# Altium PCB PCB.PcbDoc
Units mil, origin at the board's own origin, x right, y up, seen from the top; angles counter-clockwise.
Board outline 1000 x 2440 mil, 4 copper layers (Top Layer, 3V3, GND, Bottom Layer), stack 23.756 mil thick; 29 components, 26 nets, 173 pads, 58 vias.
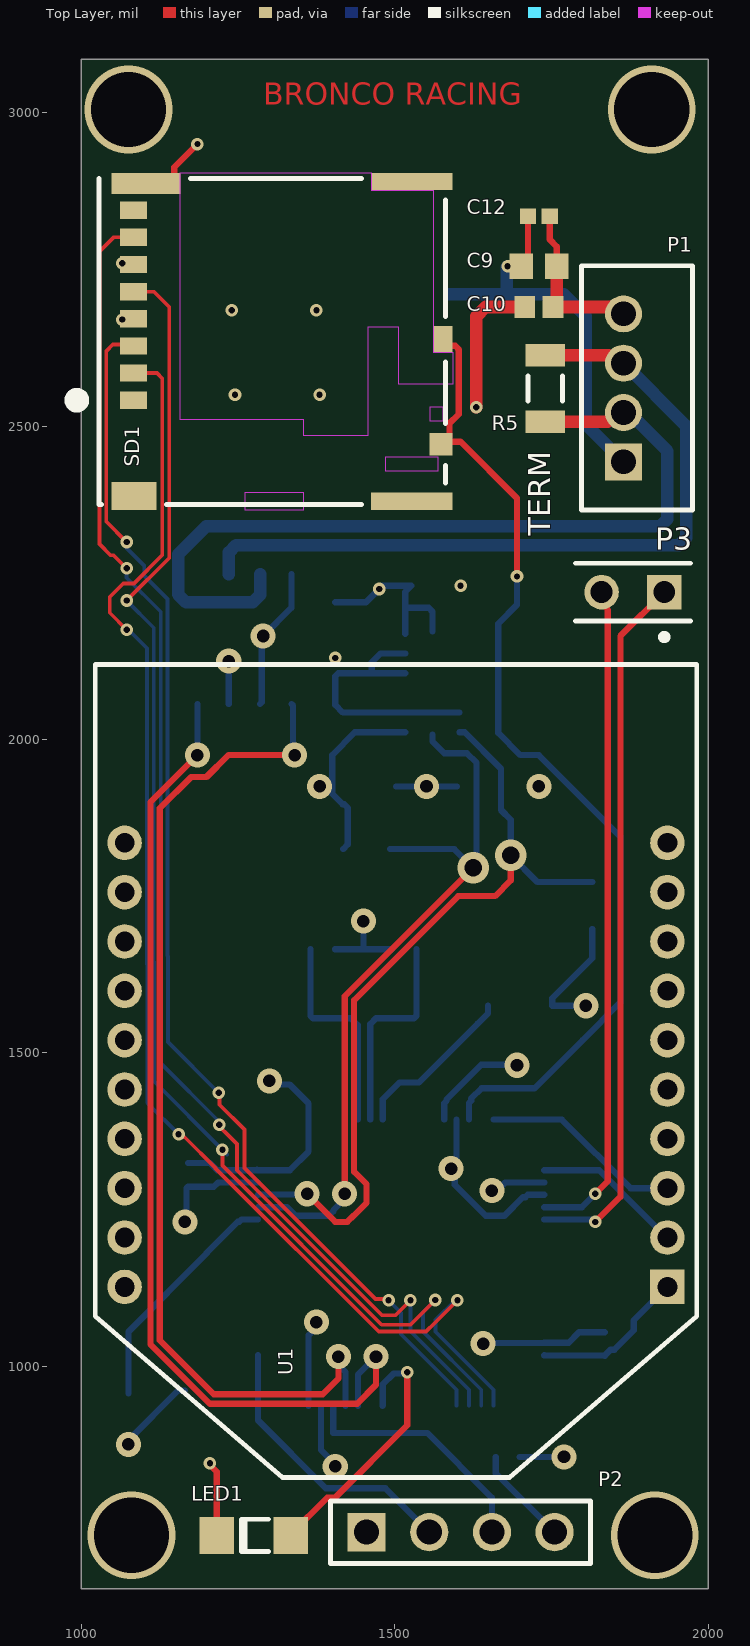
[diagram p0: Top Layer view]
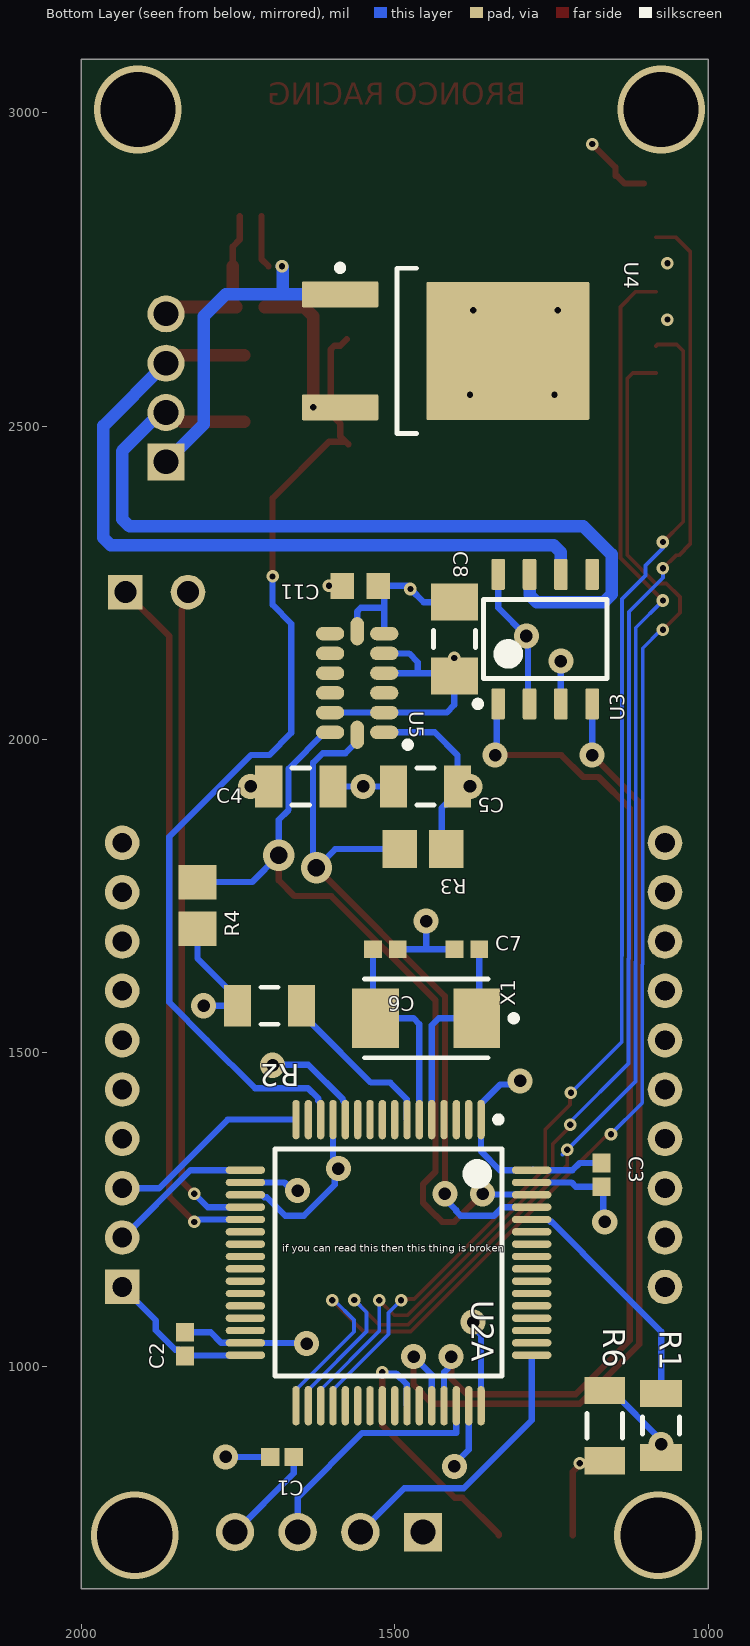
[diagram p1: Bottom Layer view, seen from below]
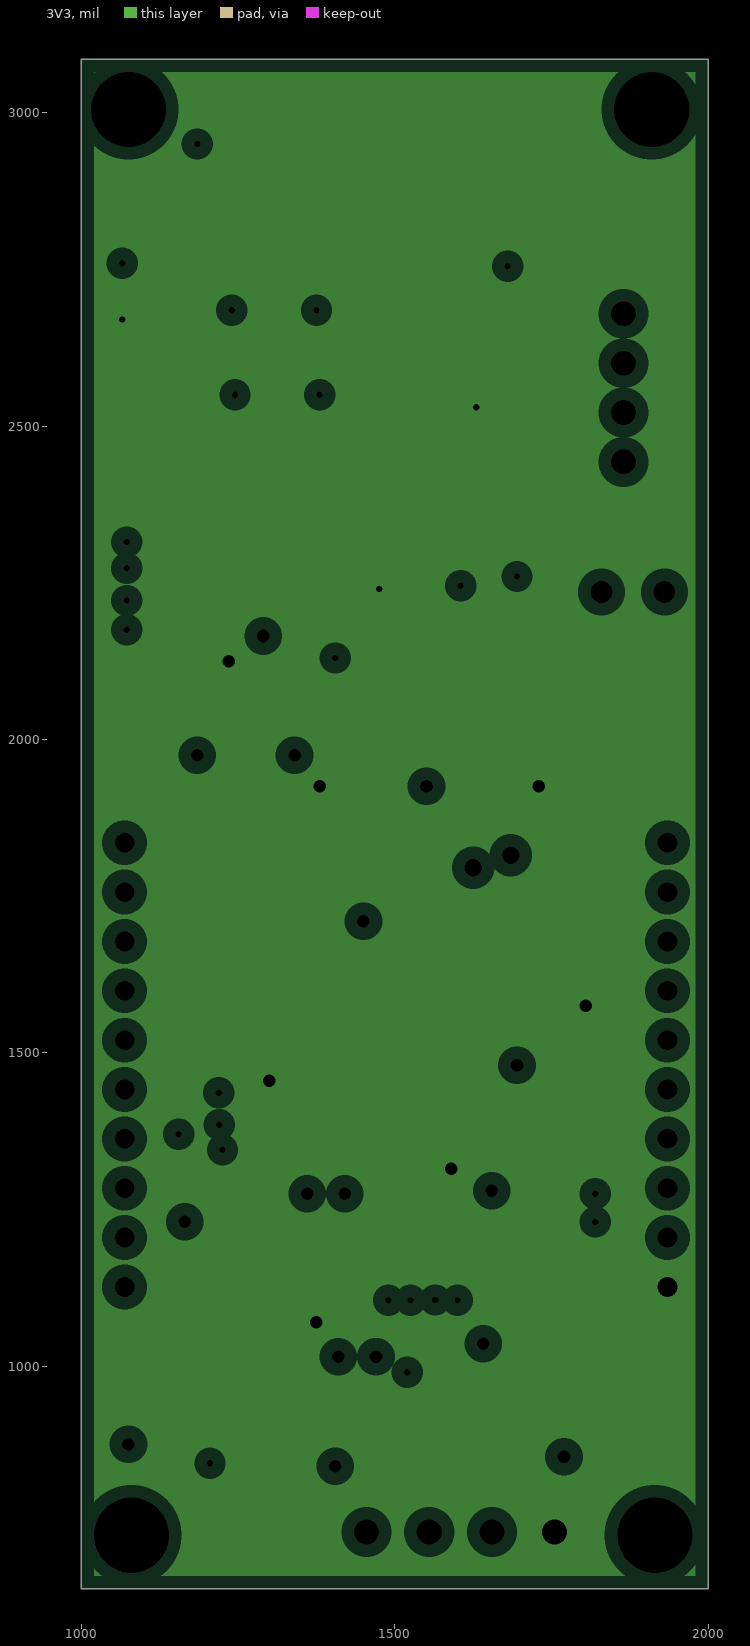
[diagram p2: 3V3, clearances drawn from the general rule]
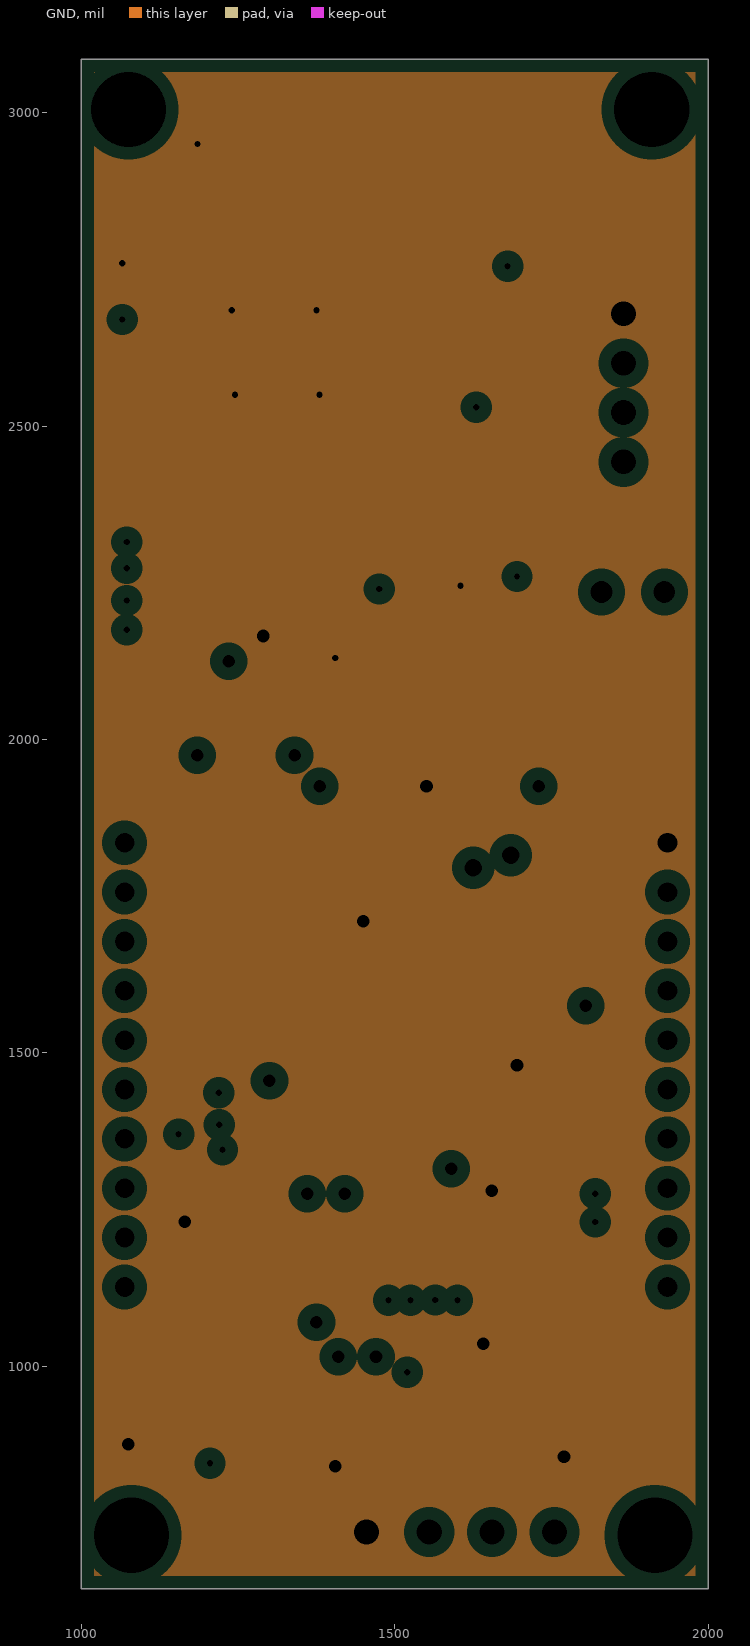
[diagram p3: GND, clearances drawn from the general rule]
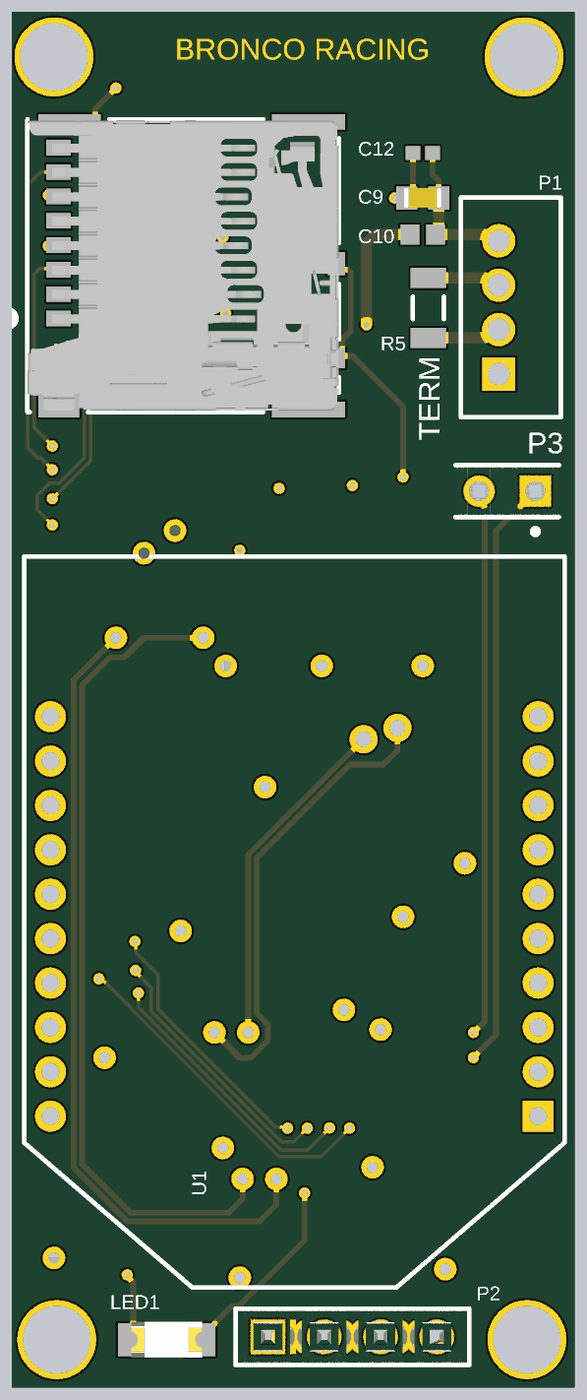
[diagram p4: 3D render of the assembled board from above, using the file's embedded part models]

## Layer stack, top to bottom
Top Solder: solder mask 0.4, Solder Resist, Dk 3.5
Top Layer: signal copper 1.4
Dielectric 2: prepreg 2.8, PP-006, Dk 4.1
3V3: plane copper 1.378, net 3V3
Dielectric 1: dielectric 12.6, FR-4, Dk 4.8
GND: plane copper 1.378, net GND
Dielectric 3: prepreg 2.8, PP-006, Dk 4.1
Bottom Layer: signal copper 1.4
Bottom Solder: solder mask 0.4, Solder Resist, Dk 3.5

## Board outline
1000,645 2000,645 2000,3085 1000,3085

## Design rules (kind name [scope] priority, off if disabled: settings)
Clearance [All] p1 off: gap=5 ignorepadtopadclearanceinfootprint=TRUE except(0: Arc-Hole Track-Hole SMDPad-Hole THPad-Hole Via-Hole Fill-Hole Poly-Hole Region-Hole Text-Hole; 10: Arc-Via Arc-Text Track-Via Track-Text SMDPad-Via SMDPad-Text THPad-THPad THPad-Via THPad-Fill THPad-Poly THPad-Region THPad-Text Via-Via Via-Fill Via-Poly Via-Region Via-Text Text-Text)
PlaneClearance [All] p1: clearance=20
PlaneConnect [All] p1: planeconnectstyle=Relief reliefexpansion=20 reliefentries=4 reliefconductorwidth=10 reliefairgap=10
PolygonConnect [All] p1: connectstyle=Relief reliefconductorwidth=10 reliefentries=4 polygonreliefangle="90 Angle" airgapwidth=10
RoutingVias [All] p1: holewidth=10 width=20 viastyle="Through Hole" minholewidth=10 minwidth=20 maxholewidth=400 maxwidth=400
SolderMaskExpansion [All] p1: expansion=4 istentingtop=FALSE
Width [All] p1: maxlimit=150 minlimit=4 preferedwidth=10 minimp=50.000000 maximp=50.000000 favimp=50.000000
28 further rules are at their usual default settings.

## Components (designator, comment, footprint, x,y, rotation, side; value= is the part's Value field where it differs from the comment)
C1 "C0402C104K8PAC7867" CAPC1005X60X30ML05T10 1680,855 r0 bottom
C2 "C0402C104K8PAC7867" CAPC1005X60X30ML05T10 1835,1035 r90 bottom
C3 "C0402C104K8PAC7867" CAPC1005X60X30ML05T10 1170,1305 r270 bottom
C4 "12065C105KAT2A" CAPC3216X180X50LL20T25 1650,1925 r180 bottom
C5 "12065C105KAT2A" CAPC3216X180X50LL20T25 1451.18,1925 r0 bottom
C6 "CAP 4.3pF 50V 0402(1005)" CAPC0402(1005)60_M 1515,1665 r0 bottom value=4.3pF
C7 "CAP 4.3pF 50V 0402(1005)" CAPC0402(1005)60_M 1385,1665 r180 bottom value=4.3pF
C8 "C1206C105K3RACTU" CAPC3216X180X50ML20T25 1405,2160 r270 bottom
C9 "GRM188R71H104KA93D" CAPC1608X90X35ML10T15 1730,2755 r0 top
C10 "GRM188R61A226ME15D" CAPC1608X100X38LL20T18 1730,2690 r0 top
C11 "GRM188R71H104KA93D" CAPC1608X90X35ML10T15 1555,2245 r0 bottom
C12 "GRM155R61A105KE15D" CAPC1005X55X25NL05T10 1730,2835 r0 top
LED1 "150120BS75000" 1206_A 1275,730 r0 top
P1 "B4B-PH-K-S(LF)(SN)" JST-B4B-PH-K-S_V 1886.65,2560.92 r90 top
P2 "TSW-104-08-T-S" SMTC-TSW-104-08-X-S 1455,735 r0 top
P3 "5-146280-2" TECO-5-146280-2_V 1880,2235 r180 top
R1 "ERA8AEB103V" RESC3216X70X50LL20T25 1075,905 r270 bottom
R2 "ERA8AEB103V" RESC3216X70X50LL20T25 1700,1575 r0 bottom
R3 "ERA6AEB472V" RESC2013X60X40ML20T25 1455,1825 r0 bottom
R4 "ERA6AEB472V" RESC2013X60X40ML20T25 1815,1735 r90 bottom
R5 "CRCW1206120RFKEA" RESC3216X60X45LL10T20 1740,2560 r90 top
R6 "300" RESC3216X70X50NL05T20 1165,905 r90 bottom
SD1 "503398-1892" MOLX-503398-1892_V 1330,2635 r90 top locked
U1 "XBP9B-DMUT-002" *DIP2200W51P200L3294H279Q20P 1501.93,1470.83 r180 top locked
U2A "STM32F303RET6" STM-LQFP64_L 1510,1165 r270 bottom locked
U3 "SN65HVD230DR" D0008A_L 1260,2160 r90 bottom
U4 "TL760M33QKVURQ1" KVU0003A_M 1420,2620 r180 bottom
U5 "ADXL345TCCZ-EP-RL7" ADI-CC-14-1_V 1560,2090 r0 bottom
X1 "ABM3-8.000MHZ-D2Y-T" ABRA-ABM3-2_V 1450,1555 r0 bottom

## Footprints (in the part's own frame and the unit in brackets; to place one, negate y for a bottom-side part, rotate by r counter-clockwise, add the part's x,y. Pads: shape width x height; smd on the part's side, far side on the other; paste and mask are expansions set on the pad)
1206_A [mm] "Chip LED, 2-Leads, Body 3.2x1.6mm, IPC Medium Density"
  rect 1.4x1.5 smd: 1(-1.5,0) 2(1.5,0)
  silkscreen extent -0.5,-0.66 0.6,0.65, body extent -1.6,-0.8 1.6,0.8, height 0.68
*DIP2200W51P200L3294H279Q20P [mm]
  rect 1.4x1.4 hole 0.8: 1(-11,8.75)
  round 1.4 hole 0.8: 2(-11,6.75) 3(-11,4.75) 4(-11,2.75) 5(-11,0.75) 6(-11,-1.25) 7(-11,-3.25) 8(-11,-5.25) 9(-11,-7.25) 10(-11,-9.25) 11(11,-9.25) 12(11,-7.25) 13(11,-5.25) 14(11,-3.25) 15(11,-1.25) 16(11,0.75) 17(11,2.75) 18(11,4.75) 19(11,6.75) 20(11,8.75)
  silkscreen extent -12.19,-16.47 12.19,16.47
ABRA-ABM3-2_V [mm] "SMD, 2-Leads, Body 5x3.2mm, Pitch 4.1mm"
  rect 1.9x2.4 smd: 1(-2.05,0) 2(2.05,0)
  silkscreen extent -3.67,-1.6 2.5,1.6, body extent -2.5,-1.6 2.5,1.6, height 1.3
ADI-CC-14-1_V [mm] "QFN, 14-Leads, Body 5x3mm, Pitch 0.8mm"
  oval 1.145x0.55 smd: 1(-1.098,2) 2(-1.098,1.2) 3(-1.098,0.4) 4(-1.098,-0.4) 5(-1.098,-1.2) 6(-1.098,-2) 8(1.097,-2) 9(1.097,-1.2) 10(1.097,-0.4) 11(1.097,0.4) 12(1.097,1.2) 13(1.097,2)
  oval 0.55x1.145 smd: 7(0,-2.097) 14(0,2.098)
  silkscreen extent -2.18,2.38 -1.93,2.62, body extent -1.5,-2.5 1.5,2.5, height 1
CAPC0402(1005)60_M [mm] "Chip Capacitor, Body 1.0x0.5mm, Height 0.6mm, IPC Low Density"
  rect 0.72x0.72 smd: 1(-0.5,0) 2(0.5,0)
  body extent -0.55,-0.3 0.55,0.3, height 0.6
CAPC1005X55X25NL05T10 [mm] "Chip Capacitor, 2-Leads, Body 1.00x0.50mm, IPC Medium Density"
  rect 0.66x0.62 smd: 1(-0.44,0) 2(0.44,0)
  body extent -0.53,-0.28 0.53,0.27, height 0.55
CAPC1005X60X30ML05T10 [mm] "Chip Capacitor, 2-Leads, Body 1.00x0.50mm, IPC Low Density"
  rect 0.76x0.72 smd: 1(-0.48,0) 2(0.48,0)
  body extent -0.53,-0.28 0.53,0.27, height 0.6
CAPC1608X90X35ML10T15 [mm] "Chip Capacitor, 2-Leads, Body 1.7x0.9mm, IPC Low Density"
  rect 0.95x1.05 smd: 1(-0.725,0) 2(0.725,0)
  body extent -0.85,-0.45 0.85,0.45, height 0.9
CAPC1608X100X38LL20T18 [mm] "Chip Capacitor, 2-Leads, Body 1.80x1.00mm, IPC High Density"
  rect 0.85x0.9 smd: 1(-0.575,0) 2(0.575,0)
  body extent -0.9,-0.5 0.9,0.5, height 1
CAPC3216X180X50LL20T25 [mm] "Chip Capacitor, 2-Leads, Body 3.20x1.60mm, IPC High Density"
  rect 1.1x1.7 smd: 1(-1.3,0) 2(1.3,0)
  silkscreen extent -0.35,-0.75 0.35,0.75, body extent -1.7,-0.9 1.7,0.9, height 1.8
CAPC3216X180X50ML20T25 [mm] "Chip Capacitor, 2-Leads, Body 3.40x1.80mm, IPC Low Density"
  rect 1.5x1.9 smd: 1(-1.5,0) 2(1.5,0)
  silkscreen extent -0.35,-0.85 0.35,0.85, body extent -1.7,-0.9 1.7,0.9, height 1.8
D0008A_L [mm] "SOIC, 8-Leads, Body 5x4mm, Pitch 1.27mm, IPC High Density"
  rrect18% 1.25x0.55 smd: 1(-2.625,1.905) 2(-2.625,0.635) 3(-2.625,-0.635) 4(-2.625,-1.905) 5(2.625,-1.905) 6(2.625,-0.635) 7(2.625,0.635) 8(2.625,1.905)
  silkscreen extent -2.75,-2.5 1.6,2.86, body extent -3,-2.45 3,2.45, height 1.63
JST-B4B-PH-K-S_V [mm] "Connector, 4-Leads, Body 9.9x4.5mm, Pitch 2mm"
  rect 1.5x1.5 hole 1: 1(-3,0.55)
  round 1.5 hole 1: 2(-1,0.55) 3(1,0.55) 4(3,0.55)
  silkscreen extent -4.95,-2.25 4.95,2.25, body extent -4.95,-2.25 4.95,2.25, height 6
KVU0003A_M [mm] "DPAK, 3-Leads, Body 6.7x6.22mm, Pitch 2.29mm, IPC Low Density"
  rrect10% 3.1x1.05 smd: 1(-4.25,2.29) 3(-4.25,-2.29)
  rrect2% 6.6x5.6 smd: 4(2.55,0)
  silkscreen extent -4.38,-3.35 -1.15,3.49, body extent -4.63,-3.28 5.07,3.3, height 2.48
MOLX-503398-1892_V [mm] "CONN, 8-Leads, Body 14.05x13.2mm, Pitch 1.1mm"
  rect 0.7x1.1 smd: 1(-2.38,6.27) 2(-1.28,6.27) 3(-0.18,6.27) 4(0.92,6.27) 5(2.02,6.27) 6(3.12,6.27) 7(4.22,6.27) 8(5.32,6.27)
  rect 1.05x0.78 smd: 9(0.095,-6.27)
  rect 0.9x0.93 smd: 10(-4.17,-6.195)
  rect 0.86x2.8 smd: 11(6.4,5.77)
  rect 0.7x3.3 smd: 12(6.48,-5.01) 13(-6.48,-5.01)
  rect 1.14x1.83 smd: 14(-6.26,6.255)
  Top Layer keep-out region: -3.22,-6.28 -2.67,-6.28 -2.67,-5.73 -3.22,-5.73
  Top Layer keep-out region: -5.235,-6.08 -4.685,-6.08 -4.685,-3.93 -5.235,-3.93
  Top Layer keep-out region: -6.83,-0.63 -6.13,-0.63 -6.13,1.77 -6.83,1.77
  Top Layer keep-out region: 6.83,4.37 6.83,-3.36 6.13,-3.36 6.13,-5.88 -0.43,-5.88 -0.43,-6.66 -1.73,-6.66 -1.73,-4.48 0.57,-4.48 0.57,-3.23 -3.82,-3.23 -3.82,-0.63 -3.17,-0.63 -3.17,4.37
  silkscreen extent -6.6,-6.38 6.6,8.82, body extent -6.55,-6.38 6.55,7.67, height 1.28
RESC2013X60X40ML20T25 [mm] "Chip Resistor, 2-Leads, Body 2.00x1.25mm, IPC Low Density"
  rect 1.4x1.55 smd: 1(-0.95,0) 2(0.95,0)
  body extent -1.1,-0.72 1.1,0.72, height 0.6
RESC3216X60X45LL10T20 [mm] "Chip Resistor, 2-Leads, Body 3.20x1.60mm, IPC High Density"
  rect 0.9x1.6 smd: 1(-1.35,0) 2(1.35,0)
  silkscreen extent -0.5,-0.7 0.5,0.7, body extent -1.65,-0.85 1.65,0.85, height 0.6
RESC3216X70X50LL20T25 [mm] "Chip Resistor, 2-Leads, Body 3.20x1.60mm, IPC High Density"
  rect 1.1x1.7 smd: 1(-1.3,0) 2(1.3,0)
  silkscreen extent -0.35,-0.75 0.35,0.75, body extent -1.7,-0.9 1.7,0.9, height 0.7
RESC3216X70X50NL05T20 [mm] "Chip Resistor, 2-Leads, Body 3.20x1.60mm, IPC Medium Density"
  rect 1.1x1.65 smd: 1(-1.425,0) 2(1.425,0)
  silkscreen extent -0.5,-0.72 0.5,0.72, body extent -1.63,-0.82 1.62,0.82, height 0.7
SMTC-TSW-104-08-X-S [mm] ".025 SQ Post Terminal Strip Assembly, 1x4 Pins, Vertical, 2.54mm Pitch, Male"
  rect 1.55x1.55 hole 1.02: 1(0,0)
  round 1.55 hole 1.02: 2(2.54,0) 3(5.08,0) 4(7.62,0)
  silkscreen extent -1.46,-1.27 9.08,1.27, body extent -1.27,-1.27 8.89,1.27, height 8.38
STM-LQFP64_L [mm] "QFP, 64-Leads, Body 10x10mm, Pitch 0.5mm, IPC High Density"
  oval 1.6x0.3 smd: 1(-5.8,3.75) 2(-5.8,3.25) 3(-5.8,2.75) 4(-5.8,2.25) 5(-5.8,1.75) 6(-5.8,1.25) 7(-5.8,0.75) 8(-5.8,0.25) 9(-5.8,-0.25) 10(-5.8,-0.75) 11(-5.8,-1.25) 12(-5.8,-1.75) 13(-5.8,-2.25) 14(-5.8,-2.75) 15(-5.8,-3.25) 16(-5.8,-3.75) 33(5.8,-3.75) 34(5.8,-3.25) 35(5.8,-2.75) 36(5.8,-2.25) 37(5.8,-1.75) 38(5.8,-1.25) 39(5.8,-0.75) 40(5.8,-0.25) 41(5.8,0.25) 42(5.8,0.75) 43(5.8,1.25) 44(5.8,1.75) 45(5.8,2.25) 46(5.8,2.75) 47(5.8,3.25) 48(5.8,3.75)
  oval 0.3x1.6 smd: 17(-3.75,-5.8) 18(-3.25,-5.8) 19(-2.75,-5.8) 20(-2.25,-5.8) 21(-1.75,-5.8) 22(-1.25,-5.8) 23(-0.75,-5.8) 24(-0.25,-5.8) 25(0.25,-5.8) 26(0.75,-5.8) 27(1.25,-5.8) 28(1.75,-5.8) 29(2.25,-5.8) 30(2.75,-5.8) 31(3.25,-5.8) 32(3.75,-5.8) 49(3.75,5.8) 50(3.25,5.8) 51(2.75,5.8) 52(2.25,5.8) 53(1.75,5.8) 54(1.25,5.8) 55(0.75,5.8) 56(0.25,5.8) 57(-0.25,5.8) 58(-0.75,5.8) 59(-1.25,5.8) 60(-1.75,5.8) 61(-2.25,5.8) 62(-2.75,5.8) 63(-3.25,5.8) 64(-3.75,5.8)
  silkscreen extent -5.92,-4.6 4.6,4.6, body extent -5,-5 5,5, height 1.6
TECO-5-146280-2_V [mm] "Connector, 2-Leads, Body 4.67x2.34mm, Pitch 2.54mm"
  rect 1.4x1.4 hole 0.89: 1(-1.27,0)
  round 1.4 hole 0.89: 2(1.27,0)
  silkscreen extent -2.33,-1.17 2.33,1.94, body extent -2.34,-1.17 2.34,1.17, height 5.33

## Part data
C1 C2 C3: library part CMP-2008-02063-1, Manufacturer=Kemet, Part Number=C0402C104K8PAC7867
C4 C5: library part CMP-2000-05866-1, "Chip Capacitor, 1 uF, +/- 10%, 50 V, -55 to 125 degC, 1206 (3216 Metric), RoHS, Tape and Reel", Capacitance=1µF, Case Size/Dimension=1206, Dielectric=X7R, Manufacturer=AVX, Package Description="2-Pin Surface Mount Device, Body 3.2 x 1.6 mm", Rated Voltage=50V, Tolerance (%)=±10%, Datasheet URL=http://datasheets.avx.com/X7RDielectric.pdf, Datasheet Version=07/2016, Manufacturer URL=http://www.avx.com/, Mounting Technology=SurfaceMount, Package Reference=1206
C6 C7: library part CMP-1034-00340-1, "CAP 4.3pF 50V ±0.25pF 0402 (1005 Metric) Thickness 0.6mm SMD", Case-EIA=0402, Case-Metric=1005, Rated Voltage="50 V", Tolerance=Â±0.25pF, Max Thickness="0.6 mm", Technology=SMT
C8: library part CMP-2000-04991-1, "Chip Capacitor, 1 uF, +/- 10%, 25 V, -55 to 125 degC, 1206 (3216 Metric), RoHS, Tape and Reel", Capacitance=1uF, Capacitance - nF=1000nF, Case Code - in=1206, Case Code - mm=3216, Case Height=1.6mm, Case Length=3.2mm, Dielectric=X7R, Manufacturer=Kemet, Maximum Operating Temperature=+125C, Minimum Operating Temperature=-55C, Operating Temperature Range=-55Cto+125C, Package / Case=1206(3216metric), Package Description="2-Pin Surface Mount Device, Body 3.2 x 1.6 mm", Temperature Coefficient / Code=+/-15%, Tolerance=10%, Voltage Rating=25V, =C1206C105K3RAC7800, Brand=Kemet, Case Width=1.6mm, Class=Class1, Datasheet URL=https://ciiva.com/datasheet-click-18194173?src=ciiva&sig=6daff8c4, Datasheet Version=Jul-14, Dimensions=1.6mmWx3.2mmLx1.6mmH, Factory Pack Quantity=2000, Manufacturer URL=http://www.kemet.com/, Package Reference=1206, Packaging=Reel, Product=GeneralTypeMLCCs, Product Category=MultilayerCeramicCapacitorsMLCC-SMD/SMT, RoHS=Details, Series=C1206C, Termination Style=SMD/SMT, Type=SMDMLCCX7R6.3-250VDCCommericalGrade, Voltage Rating DC=25V
C9 C11: library part CMP-2100-03643-1, "Chip Capacitor, 0.1 uF, +/- 10%, 50 V, -55 to 125 degC, 0603 (1608 Metric), RoHS, Tape and Reel", Capacitance=100nF, Case/Package=0603, Case Code (Metric)=1608, Dielectric=X7R, Dielectric Material=Ceramic, Insulation Resistance=10GR, Manufacturer=Murata, Max Operating Temperature=125degC, Min Operating Temperature=-55degC, Package Description="2-Pin Surface Mount Device, Body 1.6 x 0.8 mm", Package Quantity=1, Tolerance=10%, Voltage=50V, Case Code (Imperial)=0603, Contact Plating=Tin, Datasheet URL=http://psearch.en.murata.com/capacitor/product/GRM188R71H104KA93%23.pdf, Datasheet Version=42675.0, Depth=0.8mm, Height=0.8mm, Lead Free=LeadFree, Length=1.6mm, Manufacturer URL=http://www.murata.com/, Material=Ceramic, Mount=SurfaceMount, Number of Pins=2, Package Reference=0603, Packaging=TapeandReel, Radiation Hardening=No, REACH SVHC=NoSVHC, RoHSCompliant=true, Termination=SMD/SMT, Thickness=0.035inch, Voltage Rating=50V, Voltage Rating (DC)=50V, Width=0.8mm
C10: library part CMP-2000-06337-1, "Chip Capacitor, 22 uF, +/- 20%, 10 V, -55 to 85 degC, 0603 (1608 Metric), RoHS, Tape and Reel", Capacitance=22uF, Case Code - in=0603, Case Code - mm=1608, Dielectric=X5R, Manufacturer=Murata, Maximum Operating Temperature=+85C, Minimum Operating Temperature=-55C, Package / Case=0603(1608metric), Package Description="2-Pin Surface Mount Device, Body 1.6 x 0.8 mm", Tolerance=20%, Voltage Rating DC=10VDC, Brand=MurataElectronics, Datasheet URL=http://download.siliconexpert.com/pdfs/2016/4/15/5/14/5/748/mrt_/manual/267693161154190grm188r61a226me1523.pdf, Datasheet Version=04/2016, Factory Pack Quantity=4000, Height=0.8mm, Length=1.6mm, Manufacturer URL=http://www.murata.com/, Mounting Technology=SurfaceMount, Package Reference=1608, Packaging=Reel, Product=GeneralTypeMLCCs, Product Category=MultilayerCeramicCapacitorsMLCC-SMD/SMT, RoHS=True, Series=GRM, Termination Style=SMD/SMT, Type=VoltageandTemperatureDeratingRecommendedProduct, Unit Weight=0.000222oz, Width=0.8mm
C12: library part CMP-2008-04556-1, Manufacturer=Murata, Part Number=GRM155R61A105KE15D
LED1: library part CMP-1426-00015-1, "SMD mono-color Chip LED, WL-SMCW, Blue", Color=Blue, Manufacturer="Wuerth Elektronik", ComponentLink1Description="Manufacturer URL", ComponentLink1URL=http://www.we-online.com, ComponentLink2Description=Datasheet, ComponentLink2URL=http://katalog.we-online.com/led/datasheet/150120BS75000.pdf, PackageReference=1206_A, PartNumber=150120BS75000
P1: library part CMP-2000-05165-1, "Male Header, Pitch 2 mm, 1 x 4 Position, Height 6 mm, Tail Length 3.4 mm, -25 to 85 degC, RoHS, Bulk", Manufacturer=JST, Datasheet URL=http://datasheet.octopart.com/B4B-PH-K-S%28LF%29%28SN%29-JST-datasheet-10558886.pdf, Datasheet Version=Apr-09, Manufacturer URL=http://www.jst.com/home2.html, No of Positions=4, Pitch=2mm, Style/Orientation=StraightHeader/Plug, Termination=Crimp, Type=ShroudedHeader
P2: library part CMP-1024-00356-1, "0.025\" SQ Post Header, Through-hole, Vertical, -55 to 105 degC, 2.54 mm Pitch, 4-Pin, Male, RoHS", Manufacturer=Samtec, Temperature Range="-55 to 105 degC", ComponentLink1Description="Manufacturer URL", ComponentLink1URL=http://www.samtec.com, ComponentLink2Description=Datasheet, ComponentLink2URL=http://www.samtec.com/documents/webfiles/pdf/TSW_TH.PDF, ComponentLink3Description="Package Specification", ComponentLink3URL=http://www.samtec.com/documents/webfiles/cpdf/TSW-XXX-XX-XXX-X-XX-XXX-MKT.pdf, DatasheetVersion=F-214, Mounting Technology=Through-hole, Orientation=Vertical, PackageDescription=".025[0.64] SQ. Post Terminal Strip Assembly", PackageReference=TSW-104-08-X-S, PackageVersion="DM, 8/1988", PartNumber=TSW-104-08-T-S, Pitch="2.54 mm", RoHS=True
P3: library part CMP-2000-07492-1, "Male Header, Pitch 2.54 mm, 1 x 2 Position, Height 8.21 mm, Tail Length 3.05 mm, -65 to 105 degC, RoHS, Bulk", Case\/Package=100, Colour=Black, Current Rating=3A, Flammability Rating=UL94V-0, High Temperature Housing=Yes, Manufacturer="TE Connectivity", Max Current Rating=5A, Max Operating Temperature=105degC, Min Operating Temperature=-65degC, Package Description="Male Header, Pitch 2.54 mm, 1 x 2 Position, Height 8.21 mm, Tail Length 3.05 mm", Package Quantity=500, Approvals=CSA, Board Standoff=No(Without), Connector Type=Header, Contact Gender=Male, Contact Material=CopperAlloy, Contact Mating Length=0.23inch, Contact Plating=Matte, Contact Protection=No(Without), Contact Shape=Square, Datasheet URL=http://www.te.com/commerce/DocumentDelivery/DDEController?Action=showdoc&DocId=Customer+Drawing%7F146280%7FH1%7Fpdf%7FEnglish%7FENG_CD_146280_H1.pdf%7F5-146280-2, Datasheet Version="Rev. H1, 08/2016", Depth=2.34mm, Gasket=No(Without), High Speed Serial Data Connector=No, Housing Colour=Black, Housing Material=Polymer, Keyed=No, Length=4.67mm, Manufacturer URL=http://www.te.com/, Mating Alignment=No(Without), Mating Connector Lock=No(Without), Mating Post Length=0.23inch, Mount=ThroughHole, Mounting Technology=ThroughHole, Number of Contacts=2, Number of Positions=2, Number of Rows=1, Orientation=Straight, Package Reference=5-146280-2, Packaging=Carton, Panel Mount Retention=No(Without), PCB Mount Retention=Without, PCB Mounting Orientation=Vertical, PCB Thickness=0.063inch, Pitch=2.54mm, Radiation Hardening=No, RoHSCompliant=true, Row Spacing=2.54mm, Selectively Loaded=No(Without), Stabilizers=No(Without), Termination=ThroughHole, Termination Post Length=0.12inch
R1 R2: library part CMP-2003-04407-1, Manufacturer=Panasonic, Part Number=ERA8AEB103V
R3 R4: library part CMP-2001-00644-1, Manufacturer=Panasonic, Part Number=ERA6AEB472V
R5: library part CMP-2003-04838-1, Manufacturer="Vishay Dale", Part Number=CRCW1206120RFKEA
R6: library part CMP-2003-00831-1, Manufacturer=Panasonic, Part Number=ERJ8ENF3000V
SD1: library part CMP-2000-05621-1, "Micro SD Connector, Pitch 1.1 mm, 8 Position, Height 1.4 mm, -25 to 85 degC, RoHS, Tape and Reel", Current Rating=500mA, Manufacturer=Molex, Package Description="Micro SD Connector, Pitch 1.1 mm, 8 Position, Height 1.4 mm", Voltage Rating=10VAC/DC, Brand=Molex, Datasheet URL=http://www.molex.com/pdm_docs/sd/5033981892_sd.pdf, Datasheet Version="Rev. E, 04/2006", Factory Pack Quantity=2400, Manufacturer URL=http://www.molex.com/, Mounting Technology=SurfaceMount, Package Reference=503398-1892, Packaging=Reel, Product Category=MemoryCardConnectors, RoHS=Details, Series=503398
U1: "XBee-PRO 900HP DigiMesh 900 MHz 200 Kbps RF Module with U.FL Connector", Package="Module Digi International", Availability=Unavailable, MF="Digi International", MP=XBP9B-DMUT-002, Price=None, SnapEDA_Link=https://www.snapeda.com/parts/XBP9B-DMUT-002/Digi%20International/view-part/?ref=snap
U2A: library part CMP-0537-00048-1, "ARM Cortex-M4 32-bit MCU, 512 KB Flash, 80 KB Internal RAM, 51 I/Os, 64-Pin LQFP, -40 to 85 degC, Tray", I/Os (High Current)=51, Operating Frequency(F) (Processor speed) (MHz)=72, Package Description="64-Pin Low-profile Quad Flat Package, Body 10 x 10 mm, Pitch 0.5 mm", Package Reference=LQFP64, Supply Voltage(Vcc) min (V)=2, ComponentLink1Description="Manufacturer URL", ComponentLink1URL=http://www.st.com/, ComponentLink2Description=Datasheet, ComponentLink2URL=http://www.st.com/st-web-ui/static/active/en/resource/technical/document/datasheet/DM00118585.pdf, Core="ARM Cortex-M4", D/A Converter=2, DatasheetVersion="Rev. 5", FLASH Size (Prog) (kB)=512, Internal RAM Size (kB)=80, Mounting Technology="Surface Mount", Packing=Tray
U3: library part CMP-0315-00015-2, "3.3V CAN Transceiver with Standby Mode, 17 mA, -40 to 85 degC, 8-pin SOIC (D), Green (RoHS & no Sb/Br)", Drivers Per Package=1, Low Power Mode=Standby, Manufacturer="Texas Instruments", Rating=Catalog, Supply Voltage(s)(V)=3.3, Code_JEDEC=MS-012AA, ComponentLink1Description=Datasheet, ComponentLink1URL=http://www.ti.com/general/docs/lit/getliterature.tsp?genericPartNumber=SN65HVD230&fileType=pdf, DatasheetVersion=SLOS346K, Eco-Plan="Green (RoHS & no Sb/Br)", ICC(Max)(mA)=17, Isolated=No, Mounting Technology="Surface Mount", PackageDescription="8-Pin Plastic Small Outline Integrated Circuit, 4.9 x 3.9 mm, Pitch 1.27 mm Pitch", PackageReference=D0008A, PackageVersion="revM, Jun-2011", PartNumber=SN65HVD230DR, Receivers Per Package=1, SubFamily=CAN, Transient Pulse Protection(V)="-25 to 25"
U4: library part CMP-0395-01069-2, "Single Output Automotive LDO, 500 mA, Fixed 3.3 V Output, 3.8 to 26 V Input, 3-pin PFM (KVU), -40 to 125 degC, Green (RoHS & no Sb/Br)", Manufacturer="Texas Instruments", Rating=Automotive, Accuracy(%)=3, Code_JEDEC=TO-252, ComponentLink1Description="Manufacturer URL", ComponentLink1URL=http://www.ti.com/, ComponentLink2Description=Datasheet, ComponentLink2URL=http://www.ti.com/general/docs/lit/getliterature.tsp?genericPartNumber=TL760M33-Q1&fileType=pdf, ComponentLink3Description="Package Specification", ComponentLink3URL=http://www.ti.com/litv/pdf/mpsf018c, ComponentLink4Description="URL Link1", ComponentLink4URL="Samples URL:http://www.ti.com/product/tl760m33-q1#samples", DatasheetVersion=SGLS284I, Eco-Plan="Green (RoHS & no Sb/Br)", Fixed Output Options(V)=3.3, Iout(Max)(A)=0.5, Iq(Typ)(mA)=20, Mounting Technology="Surface Mount", PackageDescription="3-Pin Plastic Flange Mount, Body 6.1 x 6.6 mm, Pitch 2.29 mm", PackageReference=KVU0003A, PackageVersion=4205521-2/D, PartNumber=TL760M33QKVURQ1, SubFamily="Single Channel LDO", Vdo(Typ)(mV)=500, Vin(Max)(V)=26, Vin(Min)(V)=3.8, Vout Adj(Max)(V)=3.3, Vout Adj(Min)(V)=3.3
U5: library part CMP-0885-00032-1, "3-Axis, +/-2 g / +/-4 g / +/-8 g / +/-16 g Digital Accelerometer with Digital Output, 1.6 KHz BW, Industrial, 14-pin LGA, Reel", Manufacturer="Analog Devices", Supply Current="140 uA", Voltage Supply (V)="2.0 to 3.6", # of Axes=3, -3dB Bandwidth="1.6 KHz", ComponentLink1Description="Manufacturer URL", ComponentLink1URL=http://www.analog.com/en/index.html, ComponentLink2Description=Datasheet, ComponentLink2URL=http://www.analog.com/static/imported-files/data_sheets/ADXL345-EP.pdf, ComponentLink3Description="Package Specification", ComponentLink3URL=http://www.analog.com/static/imported-files/data_sheets/ADXL343.pdf, ComponentLink4Description="Product URL", ComponentLink4URL=http://www.analog.com/en/mems-sensors/mems-inertial-sensors/adxl345/products/product.html, DatasheetVersion="Rev. A", Mounting Technology="Surface Mount", Output Type=Digital, PackageDescription="14-Pin Land Grid Array, 3 x 5 mm Body, 0.8 mm Pitch", PackageReference=CC-14-1, PackageVersion="03-16-2010-A, 03/2010", Packing=Reel, PartNumber=ADXL345TCCZ-EP-RL7, Sensitivity="256/128/64/32 LSB/g"
X1: library part CMP-2000-05033-1, "Miniature Ceramic Crystal, 8 MHz, -40 to 85 degC, 2-Pin SMD, RoHS, Tape and Reel", Case Height=1.3mm, Case Length=5mm, Case Width=3.2mm, Frequency=8MHz, Frequency Stability=30PPM, Load Capacitance=18pF, Manufacturer=ABRACON, Operating Temperature Range=-40Cto+85C, Package / Case=5mmx3.2mm, Package Description="2-Pin Surface Mount Device, Body 5 x 3.2 mm", Package Reference=ABM3-2, Tolerance=20PPM, Brand=ABRACON, Datasheet URL=http://www.farnell.com/datasheets/1754353.pdf, Datasheet Version=Sep-13, Dimensions=3.2mmWx5mmLx1.3mmH, ESR=140Ohms, Factory Pack Quantity=1000, Manufacturer URL=http://www.abracon.com/, Mounting Style=SMD/SMT, Package URL=http://www.abracon.com/Support/PackageDrawing/Resonators/ABM3.PDF, Packaging=Reel, Product Category=Crystals, RoHS=Details, Series=ABM3, Termination Style=SMD/SMT, Type=MiniatureCeramicCrystal

## Via types
v1: diameter 20, hole 10, Top Layer to Bottom Layer, 29 vias
v2: diameter 40, hole 20, Top Layer to Bottom Layer, 23 vias
v3: diameter 140, hole 120, Top Layer to Bottom Layer, 4 vias
v4: diameter 50, hole 28, Top Layer to Bottom Layer, 2 vias

## Nets (pads, with @x,y where several pads share a name; then routed paths per layer and width w, separated by ;. In a path a pad name is that pad's centre, name@x,y a point inside that pad or via, vN(x,y) a via of type N, cw(c..) or ccw(c..) an arc to the next point about the centre after c; other vN are vias at no path point)
3V3: C1.1 C2.1 C3.1 C4.1 C5.1 C8.1 C10.1 C11.1 P2.4 R2.2 R3.1 R4.1 SD1.4 U1.1 U2A.1 U2A.13 U2A.19 U2A.32 U2A.48 U2A.64 U3.3 U4.3 U5.1 U5.6 U5.7 | length 2288.1
  Top Layer w20: v1(1630,2530) 1630,2675 1645,2690 C10.1
  Bottom Layer w10: C3.1 1205.25,1323.9 1216.51,1312.64 U2A.64@1280.84,1312.64 ; U3.3 v2(1235,2125) ; U2A.64@1280,1313.47 U2A.64@1280.84,1312.64 ; v2(1300,1455) 1305.74,1449.26 1332.04,1449.26 1362.36,1418.94 U2A.1 1362.36,1342.36 1332.64,1312.64 U2A.64 U2A.64@1280.84,1312.64 ; U2A.48 1362.36,1049.24 1375,1061.88 v2(1375,1070) ; C8.1 1454.06,2219.06 v1(1475,2240) 1480,2245 C11.1 1516.79,2235.33 1516.79,2210 ; R3.1 1425,1832.4 1425,1890.68 1419.14,1896.54 1416.65,1896.54 1400,1913.19 C5.1 1400,1975 1436.26,2011.26 U5.1 ; U5.6 1516.79,2210 ; U5.7 1560,2204.14 1554.14,2210 1516.79,2210 ; U2A.13 1598.58,1331.7 1590,1323.12 v2(1590,1315) 1595.74,1309.26 1595.74,1289.26 1645,1240 1675,1240 1704.49,1269.49 1708.49,1269.49 1712.27,1273.27 U2A.19 ; C1.1@1660.55,854.45 C1.1 1661.1,828.9 P2.4 ; U2A.32 1738.69,1017.02 1834.09,1017.02 C2.1 1835,1016.89 1844.17,1026.06 1850.44,1026.06 1881.44,1057.06 1881.44,1072.78 U1.1 ; v2(1805,1575) R2.2 1751.18,1586.81 1815,1650.63 R4.1
  other v1: 1065,2670
  other v2: 1380,1925 1730,1925
+12: C9.1 C12.1 P1.1 U4.1 | length 619.4
  Top Layer w10: C9.1 1712.68,2766.22 C12.1
  Bottom Layer w20: U4.1 1678.58,2710.16 ; v1(1680,2755) 1678.58,2753.58 1678.58,2710.16 ; P1.1 1805,2502.81 1805,2675 1769.84,2710.16 1678.58,2710.16
AUX1: P3.2 U2A.20 | length 1063
  Top Layer w10: v1(1820,1275) 1840,1295 1840,2206.58 1838.63,2207.95 1838.63,2226.37 P3.2
  Bottom Layer w10: U2A.20 1798.58,1253.58 v1(1820,1275)
AUX2: P3.1 U2A.21 | length 1133.8
  Top Layer w10: v1(1820,1230) 1860,1270 1860,2165 P3.1
  Bottom Layer w10: U2A.21 1813.4,1233.9 1817.29,1230 v1(1820,1230)
CANH: P1.2 R5.1 U3.7 | length 1376.6
  Top Layer w20: R5.1 1839.73,2506.85 1854.43,2521.55 P1.2
  Bottom Layer w20: U3.7 1285,2230.46 1273.28,2218.74 1167.03,2218.74 1154.17,2231.6 1154.17,2295.1 1199.08,2340 1923.28,2340 1935,2351.72 1935,2460.15 1873.6,2521.55 P1.2
CANL: P1.3 R5.2 U3.6 | length 1224.9
  Top Layer w20: R5.2 1841.57,2613.15 1854.43,2600.29 P1.3
  Bottom Layer w20: U3.6@1235.03,2263.38 1235.03,2298.28 1246.75,2310 1953.28,2310 1965,2321.72 1965,2500.29 P1.3
CANRX: U2A.44 U3.4 | length 1599.8
  Top Layer w10: v2(1185,1975) 1110,1900 1110,1035 1205,940 1440,940 1470,970 v2(1470,1015)
  Bottom Layer w10: v2(1185,1975) U3.4 ; U2A.44 1441.1,986.1 v2(1470,1015)
CANTX: U2A.45 U3.1 | length 1633.9
  Top Layer w10: v2(1340,1975) 1234.5,1975 1199.5,1940 1175,1940 1125,1890 1125,1041.21 1211.21,955 1385,955 1410,980 v2(1410,1015)
  Bottom Layer w10: U3.1 1337.5,2054.15 1337.5,1977.5 v2(1340,1975) ; v2(1410,1015) 1410,1006.72 1407.58,1004.3 1421.42,990.46 U2A.45
CARD_DETECT: SD1.9 SD1.10 U2A.14 | length 1601
  Top Layer w10: SD1.10 1574.49,2470.83 SD1.10@1578.66,2475 ; SD1.9 1576.85,2638.43 1587.2,2628.07 1596.35,2628.07 1602.2,2622.21 1602.2,2519.05 1587.2,2504.05 1587.2,2483.54 SD1.10@1578.66,2475 ; v1(1695,2260) 1695,2385 1605,2475 SD1.10@1578.66,2475
  Bottom Layer w10: U2A.14 1618.27,1419.43 1622.05,1423.21 1622.05,1427.05 1638.52,1443.52 1723.02,1443.52 1799.75,1520.25 1860,1580.5 1860,1844.5 1729.58,1974.92 1700.46,1974.92 1665.04,2010.35 1665.04,2184.65 1695,2214.61 v1(1695,2260)
GND: C1.2 C2.2 C3.2 C4.2 C5.2 C6.1 C7.1 C8.2 C9.2 C10.2 C11.2 C12.2 P1.4 P2.1 R1.2 R6.2 SD1.6 SD1.11 U1.10 U2A.12 U2A.18 U2A.31 U2A.47 U2A.63 U3.2 U3.8 U4.4 U5.2 U5.4 U5.5 U5.12 | length 2224.2
  Top Layer w10: SD1.11 1133.07,2886.97 1145,2898.9 1147.95,2898.9 1147.95,2912.95 v1(1185,2950) ; C12.2 1747.32,2797.68 1758.54,2786.46 C9.2
  Top Layer w20: C9.2 1758.54,2695.91 C10.2 1843.46,2690 1854.43,2679.03 P1.4
  Bottom Layer w10: v2(1075,875) 1075,881.93 1154.17,961.1 R6.2 ; v2(1165,1230) 1167.5,1232.5 1167.5,1283.6 C3.2 1211.1,1286.1 1217.95,1292.95 U2A.63 ; U3.2 1287.5,2059.15 1287.5,2162.5 v2(1290,2165) 1335,2210 U3.8 ; U2A.47 1382.05,866.54 1405,843.59 v2(1405,840) ; C7.1 1450,1665 ; v2(1450,1710) 1450,1665 ; C6.1 1450,1665 ; C5.2 C4.2 ; U5.4 1463.3,2105.75 ; U5.5 1477.24,2137.24 1463.3,2123.3 1463.3,2105.75 ; U2A.12 1578.9,1419.43 1582.68,1423.21 1582.68,1425.53 1638.01,1480.86 1694.14,1480.86 v2(1695,1480) ; U5.12 U5.2 1417.24,2042.76 1405,2055 C8.2 1409.8,2105.75 1463.3,2105.75 ; v2(1640.83,1035.83) 1641.7,1036.7 1738,1036.7 U2A.31 1738.69,1037.39 1777.39,1037.39 1793.9,1053.9 C2.2 ; v2(1655,1280) 1663.12,1280 1676.07,1292.95 U2A.18 ; C1.2 v2(1770,855)
  other v1: 1405,2130 1605,2245 1245,2550 1380,2550 1240,2685 1375,2685 1065,2760
  other v2: 1550.59,1925
MISO: SD1.7 U2A.35 | length 2213.3
  Top Layer w6: v1(1072.06,2273) 1051.38,2293.68 1046.72,2293.68 1028.72,2311.68 1028.72,2778.72 1051.14,2801.14 SD1.7 ; v1(1220,1385) 1220,1382.53 1234.53,1368 1248,1354.53 1248,1312.56 1479.56,1081 1501,1081 v1(1525,1105)
  Bottom Layer w6: v1(1072.06,2273) 1072.06,2257.94 1126.42,2203.58 1126.42,1650.14 1127,1649.55 1127,1483 1220,1390 v1(1220,1385) ; v1(1525,1105) 1525,1055.51 1618.27,962.24 U2A.35
MOSI: SD1.3 U2A.36 | length 1974.2
  Top Layer w6: v1(1072.06,2315) 1039.72,2347.35 1039.72,2619.72 1050,2630 1081.06,2630 SD1.3 ; v1(1218.91,1436.09) 1220.44,1434.56 1220.44,1417.09 1260,1377.53 1260,1316.11 1469.08,1107.03 1487.97,1107.03 v1(1490,1105)
  Bottom Layer w6: v1(1072.06,2315) 1072.06,2305.53 1100,2277.59 1100,2261.67 1137.42,2224.25 1137.42,1654.69 1138,1654.11 1138,1517 v1(1218.91,1436.09) ; v1(1490,1105) 1510,1085 1510,1050.81 1598.58,962.22 U2A.36
NetC6_2: C6.2 U2A.6 X1.2 | length 337.8
  Bottom Layer w10: U2A.6 1460.79,1545.79 1470,1555 X1.2 1534.69,1558.98 C6.2
NetC7_2: C7.2 U2A.5 X1.1 | length 338.6
  Bottom Layer w10: C7.2 1365.31,1558.98 X1.1 1430,1555 1441.1,1543.9 U2A.5
NetLED1_1: LED1.1 R6.1 | length 119.5
  Top Layer w10: v1(1205,845) 1205,842.29 1215.94,831.35 LED1.1
NetLED1_2: LED1.2 U2A.42 | length 425.7
  Top Layer w10: LED1.2 1334.06,731.97 1392.1,790.02 1404.51,790.02 1520,905.5 v1(1520,990)
  Bottom Layer w10: U2A.42 1480.82,937 1480.82,970.82 1498.09,988.09 1518.09,988.09 v1(1520,990)
NetR1_1: R1.1 U2A.60 | length 380
  Bottom Layer w10: R1.1 1075,1055 1200,1180 1200,1180.64 1249.47,1230.12 1251.79,1230.12 1255.57,1233.9 U2A.60
NetR2_1: R2.1 U2A.7 | length 269.3
  Bottom Layer w10: U2A.7 1480.82,1393.69 1480.82,1425.82 1507.43,1452.43 1538.06,1452.43 1632.17,1546.54 1648.82,1563.19 R2.1
RX: U1.2 U2A.17 | length 241.2
  Bottom Layer w10: U2A.17 1826.15,1312.64 1933.71,1205.08 U1.2
SCK: SD1.5 U2A.34 | length 2215.3
  Top Layer w6: v1(1072.06,2221.67) 1140,2289.6 1140,2690 1115.47,2714.53 SD1.5 ; v1(1225,1345) 1225,1320 1479,1066 1525.1,1066 v1(1564.55,1105.45)
  Bottom Layer w6: v1(1072.06,2221.67) 1115.42,2178.31 1115.42,1645.58 1116,1645 1116,1454 v1(1225,1345) 1232.31,1337.69 ; v1(1564.55,1105.45) 1545,1085.9 1545,1055.2 1637.95,962.24 U2A.34
SCL: R3.2 U2A.61 U5.14 | length 1179.3
  Top Layer w10: v2(1420,1275) 1420,1590 v4(1625,1795)
  Bottom Layer w10: U2A.61 1328.15,1253.58 1341.73,1240 1395,1240 1402.07,1247.07 1402.07,1248.95 1420,1266.88 v2(1420,1275) ; R3.2 1595,1825 v4(1625,1795) 1630.47,1800.47 1630.47,1962.61 1615.04,1978.04 1578.86,1978.04 1560,1996.9 U5.14
SDA: R4.2 U2A.62 U5.13 | length 1288.9
  Top Layer w10: v2(1360,1275) 1405,1230 1424.14,1230 1434.14,1240 1434.5,1240 1455,1260.5 1455,1290 1435,1310 1435,1583.79 1601.21,1750 1660,1750 1685,1775 v4(1685,1815)
  Bottom Layer w10: U2A.62 1282,1273.61 1358.61,1273.61 v2(1360,1275) ; U5.13 1611.77,2011.26 1669.53,1953.5 1669.53,1887.39 1685,1871.92 v4(1685,1815) 1727.6,1772.4 R4.2
SPISS: SD1.2 U2A.33 | length 2169.1
  Top Layer w6: v1(1072.06,2175) 1045,2202.06 1045,2227.13 1066.83,2248.96 1083.8,2248.96 1129,2294.16 1129,2576 1120.39,2584.61 SD1.2 ; v1(1155,1370) 1158.79,1370 1163.72,1365.07 1164.93,1365.07 1214,1316 1214,1315.44 1474.44,1055 1550,1055 1565,1070 1577.23,1082.23 v1(1600,1105)
  Bottom Layer w6: v1(1072.06,2175) 1075,2175 1104.42,2145.58 1104.42,1641.02 1105,1640.44 1105,1420 v1@1156.38,1368.62 ; v1(1600,1105) 1596.63,1105 1565,1073.37 1565,1054.88 1657.64,962.24 U2A.33
SWCLK: P2.2 U2A.49 | length 451.2
  Bottom Layer w10: U2A.49 1281.65,913.35 1390,805 1485,805 P2.2
SWDIO: P2.3 U2A.46 | length 394.4
  Bottom Layer w10: U2A.46 1401.73,893.27 1551.73,893.27 1655,790 P2.3
TX: U1.3 U2A.16 | length 322.7
  Bottom Layer w10: U2A.16 1766.65,1393.35 1876.18,1283.82 U1.3
pads on no net: SD1.1 SD1.8 SD1.12 SD1.13 SD1.14 U1.4 U1.5 U1.6 U1.7 U1.8 U1.9 U1.11 U1.12 U1.13 U1.14 U1.15 U1.16 U1.17 U1.18 U1.19 U1.20 U2A.2 U2A.3 U2A.4 U2A.8 U2A.9 U2A.10 U2A.11 U2A.15 U2A.22 U2A.23 U2A.24 U2A.25 U2A.26 U2A.27 U2A.28 U2A.29 U2A.30 U2A.37 U2A.38 U2A.39 U2A.40 U2A.41 U2A.43 U2A.50 U2A.51 U2A.52 U2A.53 U2A.54 U2A.55 U2A.56 U2A.57 U2A.58 U2A.59 U3.5 U5.3 U5.8 U5.9 U5.10 U5.11
copper on no net:
  other v3: 1080,730 1915,730 1075,3005 1910,3005

## Polygon pours and split planes (outlines as drawn)
3V3 on 3V3 (split plane): 1979.9,665.1 1020.1,665.1 1020.1,3064.9 1979.9,3064.9
GND on GND (split plane): 1979.9,665.1 1020.1,665.1 1020.1,3064.9 1979.9,3064.9

## Other copper
Top Layer:
  text "BRONCO RACING" at 1290,3000.66 h60

## Silkscreen, mask and mechanical layers (free items; w line width, h text height)
Top Overlay:
  text "TERM" at 1760,2325 h60 r90
Bottom Overlay:
  text "if you can read this then this thing is broken" at 1680,1178.76 h20
Top Solder:
  text "BRONCO RACING" at 1290,3000.66 h60